# Altium PCB Plocica_kalibrator.PcbDoc (part 1 of 2)
Units mil, origin at the board's own origin, x right, y up, seen from the top; angles counter-clockwise.
Board outline 6889.76 x 4133.86 mil, 2 copper layers (Top Layer, Bottom Layer); 126 components, 118 nets, 449 pads, 105 vias.
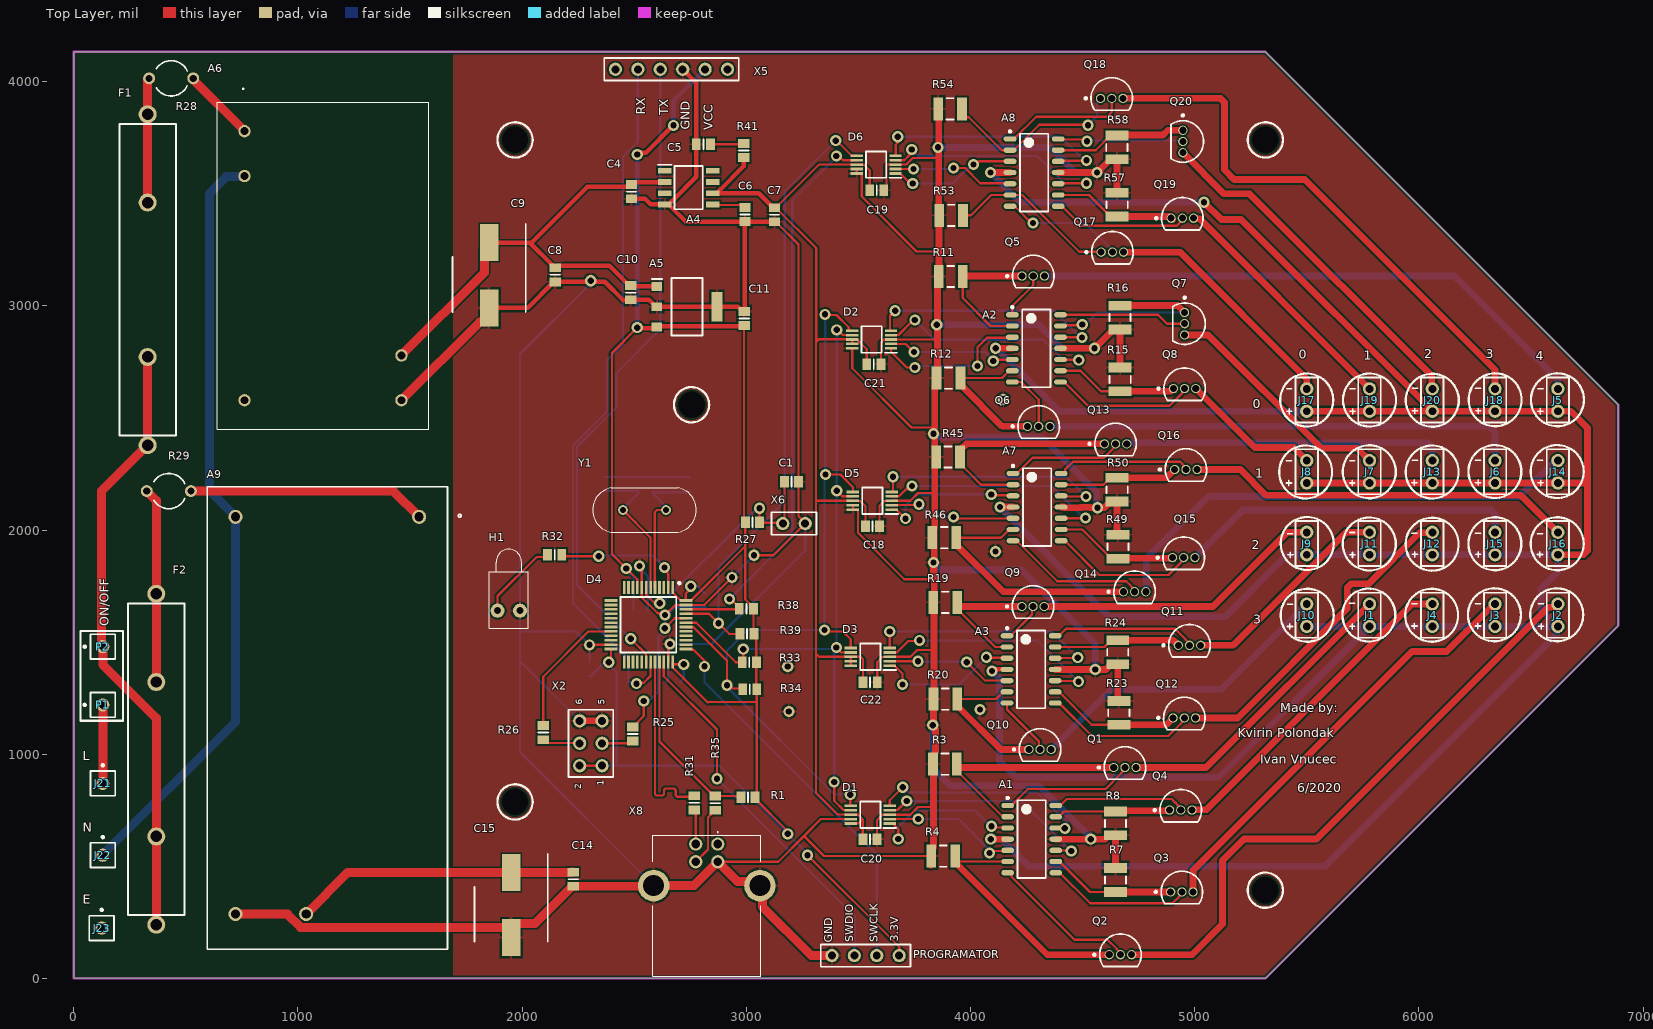
[diagram p0: Top Layer view]
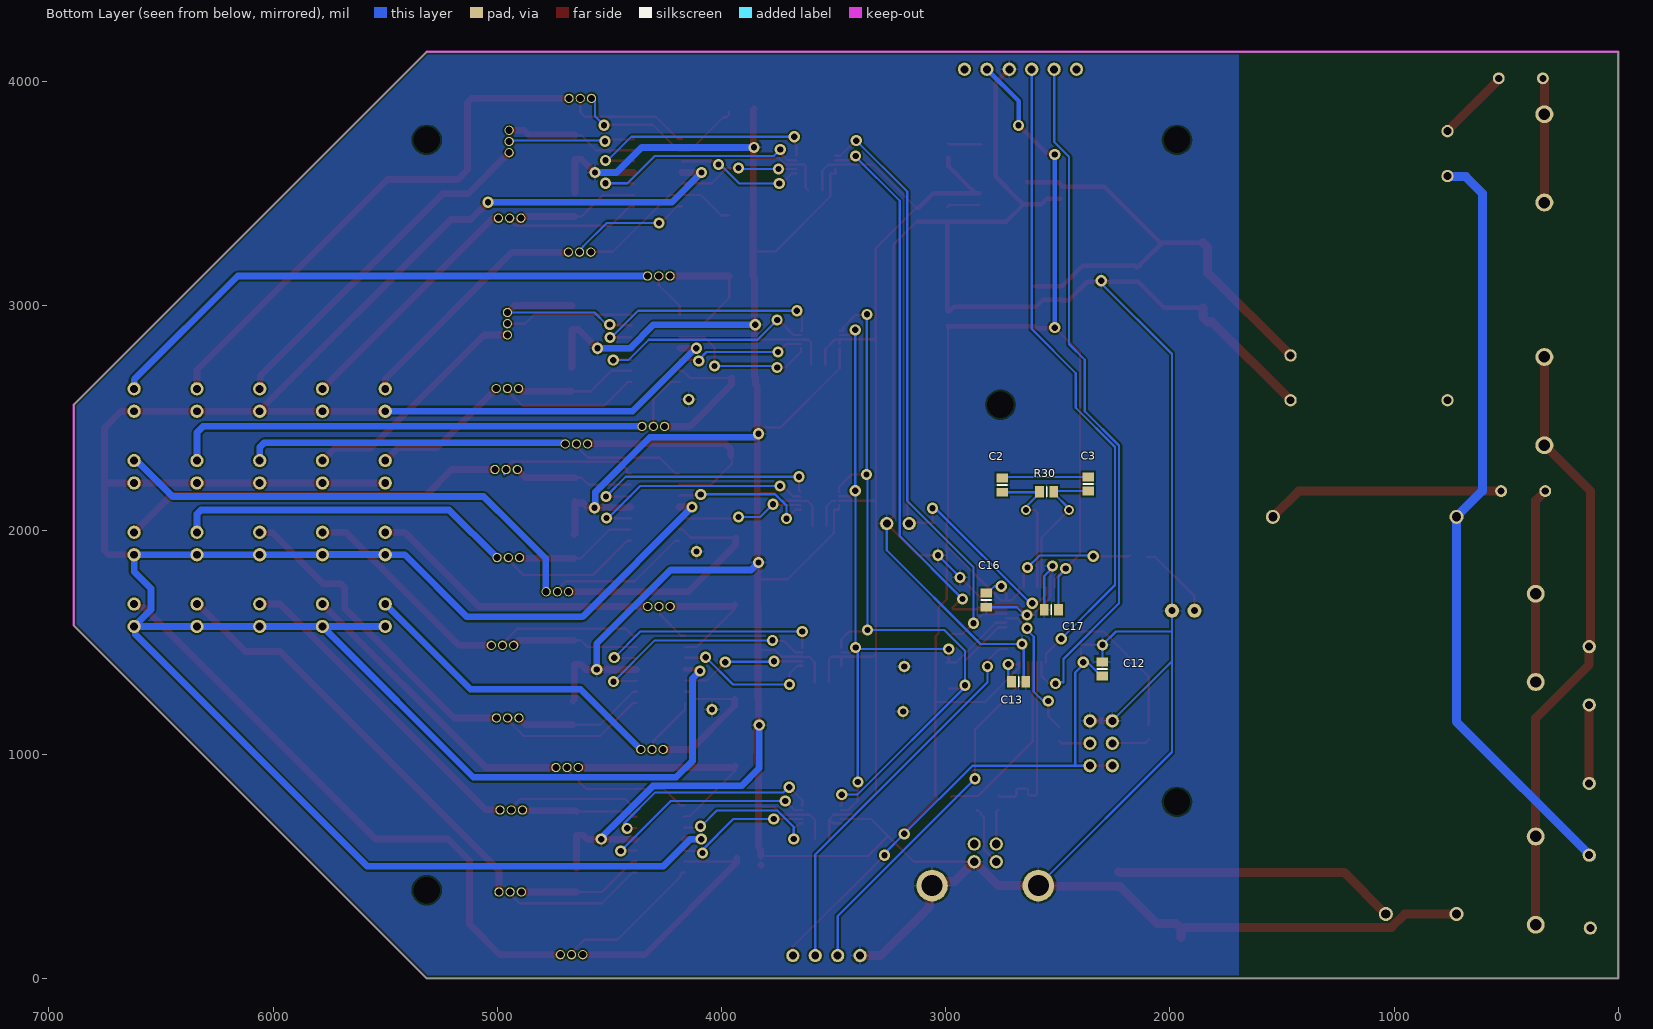
[diagram p1: Bottom Layer view, seen from below]

## Layer stack, top to bottom
Top Solder: solder mask 0.4, Solder Resist, Dk 3.5
Top Layer: signal copper 1.4
Dielectric 1: dielectric 12.6, FR-4, Dk 4.8
Bottom Layer: signal copper 1.4
Bottom Solder: solder mask 0.4, Solder Resist, Dk 3.5

## Board outline
0,0 0,4133.86 5314.96,4133.86 6889.76,2559.06 6889.76,1574.8 5314.96,0

## Design rules (kind name [scope] priority, off if disabled: settings)
Clearance [All] p1: gap=8 ignorepadtopadclearanceinfootprint=TRUE
HoleSize [All] p1: absolutevalues=TRUE maxlimit=125.98 minlimit=0.98 maxpercent=80.000 minpercent=20.000
PolygonConnect [All] p1: connectstyle=Relief reliefconductorwidth=10 reliefentries=4 polygonreliefangle="90 Angle" airgapwidth=10
RoutingVias [All] p1: holewidth=28 width=50 viastyle="Through Hole" minholewidth=28 minwidth=50 maxholewidth=28 maxwidth=50
SolderMaskExpansion [All] p1: expansion=4 istentingtop=FALSE
Width [All] p1: maxlimit=60 minlimit=8 preferedwidth=10 minimp=50.000000 maximp=50.000000 favimp=50.000000
29 further rules are at their usual default settings.

## Classes and differential pairs
component class power: A5 A6 A9 C8 C9 C10 C11 C14 C15 F1 F2 J21 J22 J23 P1 P2 R28 R29
component class mikrokontroler: A4 C1 C2 C3 C4 C5 C6 C7 D4 H1 PROGRAMATOR R1 R25 R26 R27 R30 R31 R32 R33 R34 R35 R38 R39 R41 X2 X5 X6 X8 Y1
component class led5: A8 D6 J17 J18 J19 J20 Q17 Q18 Q19 Q20 R53 R54 R57 R58
component class led4: A3 D3 J9 J10 J11 J12 Q9 Q10 Q11 Q12 R19 R20 R23 R24
component class led3: A2 D2 J5 J6 J7 J8 Q5 Q6 Q7 Q8 R11 R12 R15 R16
component class led2: A1 D1 J1 J2 J3 J4 Q1 Q2 Q3 Q4 R3 R4 R7 R8
component class led1: A7 D5 J13 J14 J15 J16 Q13 Q14 Q15 Q16 R45 R46 R49 R50
component class blokadni_kondenzatori: C12 C13 C16 C17 C18 C19 C20 C21 C22

## Components (designator, comment, footprint, x,y, rotation, side; value= is the part's Value field where it differs from the comment)
A1 "OPA4990" SOIC127P600X175-14N 4273.2,621.5 r0 top
A2 "OPA4990" SOIC127P600X175-14N 4294.2,2810.5 r0 top
A3 "OPA4990" SOIC127P600X175-14N 4270.48,1378.5 r0 top
A4 "REF5050AIDG4" SOIC127P600X175-8N 2742.97,3527.5 r0 top
A5 "MC33275ST-3.3T3G" SOT230P700X175-4N 2735.45,2996 r0 top
A6 "IRM-03-9" IRM039 762,3779 r270 top
A7 "OPA4990" SOIC127P600X175-14N 4297.2,2102.5 r0 top
A8 "OPA4990" SOIC127P600X175-14N 4283.91,3594.5 r0 top
A9 "IRM-15-12" IRM-15-12 596.12,2192.86 r270 top
C1 "Cap" 6-0805_L 3201.5,2216 r180 top value=100nF
C2 "Cap" 6-0805_L 2747,2200.5 r270 bottom value=20pF
C3 "Cap" 6-0805_L 2365,2205.5 r270 bottom value=20pF
C4 "Cap" 6-0805_L 2488.2,3509.5 r90 top value=1uF
C5 "Cap" 6-0805_L 2808.7,3720.5 r0 top value=1uF
C6 "Cap" 6-0805_L 2994.45,3407.5 r90 top value=1uF
C7 "Cap" 6-0805_L 3126,3406.5 r90 top value=1uF
C8 "10V" 6-0805_L 2147,3138.5 r90 top value=100nF
C9 "10V" CAPAE830X1050N 1853,3136.33 r270 top value=47uF
C10 "Cap" 6-0805_L 2484.2,3058.99 r90 top value=330nF
C11 "Cap" 6-0805_L 2990,2943.5 r270 top value=330nF
C12 "Cap" 6-0805_L 2301,1380.5 r270 bottom value=100nF
C13 "Cap" 6-0805_L 2674.5,1323 r0 bottom value=100nF
C14 "16V" 6-0805_L 2229,442.5 r90 top value=100nF
C15 "16V" CAPAE830X1050N 1951,327.67 r270 top value=47uF
C16 "Cap" 6-0805_L 2819,1687.5 r90 bottom value=100nF
C17 "Cap" 6-0805_L 2529,1645 r180 bottom value=100nF
C18 "Cap" 6-0805_L 3563,2018 r180 top value=100nF
C19 "Cap" 6-0805_L 3582,3516 r180 top value=100nF
C20 "Cap" 6-0805_L 3551.5,622 r180 top value=100nF
C21 "Cap" 6-0805_L 3569,2740 r180 top value=100nF
C22 "Cap" 6-0805_L 3552.5,1321 r180 top value=100nF
D1 "DAC5574IDGS" SOP50P490X110-10N 3553.2,730.5 r180 top
D2 "DAC5574IDGS" SOP50P490X110-10N 3559,2850 r180 top
D3 "DAC5574IDGS" SOP50P490X110-10N 3553.2,1434.5 r180 top
D4 "STM32F103C8T6" QFP50P900X900X160-48N 2563.54,1577.5 r270 top
D5 "DAC5574IDGS" SOP50P490X110-10N 3562.2,2130.5 r180 top
D6 "DAC5574IDGS" SOP50P490X110-10N 3579,3630 r180 top
F1 "Fuse 1" 0751.0056 330,2378.3 r90 top
F2 "Fuse 1" 0751.0056 368.55,239.62 r90 top
H1 "LED1" LED-1 1940.88,1640.35 r90 top
J1 "D01-9970242" HDR1X2 5780,1670 r270 top
J2 "D01-9970242" HDR1X2 6620,1670 r270 top
J3 "D01-9970242" HDR1X2 6340,1670 r270 top
J4 "D01-9970242" HDR1X2 6060,1670 r270 top
J5 "D01-9970242" HDR1X2 6620,2630 r270 top
J6 "D01-9970242" HDR1X2 6340,2310 r270 top
J7 "D01-9970242" HDR1X2 5780,2310 r270 top
J8 "D01-9970242" HDR1X2 5500,2310 r270 top
J9 "D01-9970242" HDR1X2 5500,1990 r270 top
J10 "D01-9970242" HDR1X2 5500,1670 r270 top
J11 "D01-9970242" HDR1X2 5780,1990 r270 top
J12 "D01-9970242" HDR1X2 6060,1990 r270 top
J13 "D01-9970242" HDR1X2 6060,2310 r270 top
J14 "D01-9970242" HDR1X2 6620,2310 r270 top
J15 "D01-9970242" HDR1X2 6340,1990 r270 top
J16 "D01-9970242" HDR1X2 6620,1990 r270 top
J17 "D01-9970242" HDR1X2 5500,2630 r270 top
J18 "D01-9970242" HDR1X2 6340,2630 r270 top
J19 "D01-9970242" HDR1X2 5780,2630 r270 top
J20 "D01-9970242" HDR1X2 6060,2630 r270 top
J21 "L" PIN1 130,870 r0 top
J22 "N" PIN1 130,550 r0 top
J23 "E" PIN1 125,225 r0 top
P1 "Plug" PIN1 130,1220 r90 top
P2 "Plug" PIN1 130,1480 r90 top
PROGRAMATOR "Programator" HDR1X4 3682,102 r180 top (schematic designator X1)
Q1 "2N7000" ONSC-TO-92-3-29-11 4689,941 r0 top
Q2 "2N7000" ONSC-TO-92-3-29-11 4669,106 r0 top
Q3 "2N7000" ONSC-TO-92-3-29-11 4943,386 r0 top
Q4 "2N7000" ONSC-TO-92-3-29-11 4938,751 r0 top
Q5 "2N7000" ONSC-TO-92-3-29-11 4280,3133 r0 top
Q6 "2N7000" ONSC-TO-92-3-29-11 4304.2,2462.5 r0 top
Q7 "2N7000" ONSC-TO-92-3-29-11 4955.2,2920.5 r270 top
Q8 "2N7000" ONSC-TO-92-3-29-11 4955,2631 r0 top
Q9 "2N7000" ONSC-TO-92-3-29-11 4279,1659 r0 top
Q10 "2N7000" ONSC-TO-92-3-29-11 4310.2,1021.5 r0 top
Q11 "2N7000" ONSC-TO-92-3-29-11 4977,1486 r0 top
Q12 "2N7000" ONSC-TO-92-3-29-11 4954,1162 r0 top
Q13 "2N7000" ONSC-TO-92-3-29-11 4647.2,2384.5 r0 top
Q14 "2N7000" ONSC-TO-92-3-29-11 4732,1725 r0 top
Q15 "2N7000" ONSC-TO-92-3-29-11 4951,1877 r0 top
Q16 "2N7000" ONSC-TO-92-3-29-11 4961,2270 r0 top
Q17 "2N7000" ONSC-TO-92-3-29-11 4633.2,3239.5 r0 top
Q18 "2N7000" ONSC-TO-92-3-29-11 4630.2,3925.5 r0 top
Q19 "2N7000" ONSC-TO-92-3-29-11 4945,3391 r0 top
Q20 "2N7000" ONSC-TO-92-3-29-11 4947.17,3733.17 r270 top
R1 "Res2" 6-0805_L 3007.5,809 r0 top value=4,7k
R3 "Res2" C1210 3885.85,956 r0 top value=0,1K
R4 "Res2" C1210 3878.85,546 r0 top value=0,1K
R7 "Res2" C1210 4647,439.15 r270 top value=0,1K
R8 "Res2" C1210 4647,691.85 r90 top value=0,1K
R11 "Res2" C1210 3912,3131 r0 top value=0,1K
R12 "Res2" C1210 3902.15,2678 r0 top value=0,1K
R15 "Res2" C1210 4668,2671.85 r270 top value=0,1K
R16 "Res2" C1210 4667,2948 r90 top value=0,1K
R19 "Res2" C1210 3887.83,1677.56 r0 top value=0,1K
R20 "Res2" C1210 3887.85,1246 r0 top value=0,1K
R23 "Res2" C1210 4662,1184.85 r270 top value=0,1K
R24 "Res2" C1210 4657,1455 r90 top value=0,1K
R25 "Res2" 6-0805_L 2494,1090.5 r90 top value=10K
R26 "Res2" 6-0805_L 2094,1096.5 r270 top value=10K
R27 "Res2" 6-0805_L 3027.5,2035 r180 top value=4.7K
R28 "Res Varistor" CAPR5-4X5 435,4015 r0 top
R29 "Res Varistor" CAPR5-4X5 424.43,2174 r0 top
R30 "Res2" 6-0805_L 2550,2170 r0 bottom value=1M
R31 "Res2" 6-0805_L 2767,783.5 r270 top value=20
R32 "Res2" 6-0805_L 2145.5,1889 r180 top value=260R
R33 "Res2" 6-0805_L 3013.5,1410 r0 top value=4.7K
R34 "Res2" 6-0805_L 3015.5,1291 r0 top value=4.7K
R35 "Res2" 6-0805_L 2862,782 r270 top value=20
R38 "Res2" 6-0805_L 3000.5,1649 r0 top value=4.7K
R39 "Res2" 6-0805_L 3003.5,1537 r0 top value=4.7K
R41 "Res2" 6-0805_L 2988.45,3693 r90 top value=0.001K
R45 "Res2" C1210 3900,2326 r0 top value=0,1K
R46 "Res2" C1210 3883,1966 r0 top value=0,1K
R49 "Res2" C1210 4658,1925.85 r90 top value=0,1K
R50 "Res2" C1210 4654,2180.15 r270 top value=0,1K
R53 "Res2" C1210 3914,3404 r0 top value=0,1K
R54 "Res2" C1210 3908.85,3879 r0 top value=0,1K
R57 "Res2" C1210 4654.2,3451.35 r270 top value=0,1K
R58 "Res2" C1210 4653.2,3706.65 r90 top value=0,1K
X2 "Header 3X2" HDR2X3 2357,949 r90 top
X5 "Bluetooth" HDR1X6 2416.54,4055.12 r0 top
X6 "RESET" HDR1X2 3163,2029 r0 top
X8 "61729-1011BLF" 617291011BLF 2873.22,599.43 r0 top
Y1 "ABL-8.000MHZ-B2" HC/49US_(AT49)PTH 2546.21,2089.31 r180 top

## Footprints (in the part's own frame and the unit in brackets; to place one, negate y for a bottom-side part, rotate by r counter-clockwise, add the part's x,y. Pads: shape width x height; smd on the part's side, far side on the other; paste and mask are expansions set on the pad)
6-0805_L [mm] "Chip Resistor, Body 2.0x1.2mm, IPC High Density"
  rect 1x1.3 smd: 1(-0.8,0) 2(0.8,0)
  silkscreen extent 0,-0.55 0,0.55, body extent -1.07,-0.7 1.07,0.7, height 0.7
0751.0056 [mil] "6.3 x 32 mm Fuse cliping"
  round 80 hole 51.18: 1(0,0) 1(393.7,0) 2(1082.68,0) 2(1476.38,0)
  silkscreen extent 43,-126 1433,126
617291011BLF [mm]
  round 1.5 hole 1: 1(0,0) 2(-2.5,0) 3(-2.5,-2) 4(0,-2)
  round 3.57 hole 2.38: MH1(4.77,-4.71) MH2(-7.27,-4.71)
  silkscreen extent -7.35,-14.99 4.85,1.4, body extent -8.35,-14.99 5.86,1.01, height 11.6
C1210 [mm] "Chip Capacitor, Body 3.2x2.5mm, IPC High Density"
  rect 1.1x2.6 smd: 1(-1.35,0) 2(1.35,0)
  silkscreen extent -0.4,-1.2 0.4,1.2, body extent -1.7,-1.35 1.7,1.35, height 1.3
CAPAE830X1050N [mm]
  rect 4.2x2.1 smd: 1(-3.7,0) 2(3.7,0)
  silkscreen extent -5.8,-4.15 4.15,4.15, body extent -5,-4.25 5,4.25, height 10.5
CAPR5-4X5 [mm] "Capacitor; 2 Leads"
  round 1.35 hole 0.8: 1(-2.5,0) 2(2.5,0)
  silkscreen extent -1.69,-2 1.82,2
HC/49US_(AT49)PTH [mm]
  round 1.1 hole 0.66: 1(-2.44,0) 2(2.44,0)
  silkscreen extent -5.88,-2.5 5.88,2.5
HDR1X2 [mm] "Connector; Header; 2 Position"
  round 1.5 hole 0.9: 1(0,0) 2(2.54,0)
  silkscreen extent -1.27,-1.27 3.81,1.27
HDR1X4 [mm] "Connector; Header; 4 Position"
  round 1.5 hole 0.9: 1(0,0) 2(2.54,0) 3(5.08,0) 4(7.62,0)
  silkscreen extent -1.27,-1.27 8.89,1.27
HDR1X6 [mm] "Connector; Header; 6 Position"
  round 1.5 hole 0.9: 1(0,0) 2(2.54,0) 3(5.08,0) 3(10.16,0) 4(7.62,0) 6(12.7,0)
  silkscreen extent -1.27,-1.27 13.97,1.27
HDR2X3 [mm] "Connector; Header; 3x2 Position"
  round 1.5 hole 0.9: 1(0,0) 2(0,2.54) 3(2.54,0) 4(2.54,2.54) 5(5.08,0) 6(5.08,2.54)
  silkscreen extent -1.27,-1.27 6.35,3.81
IRM039 [mm]
  round 1.4 hole 0.9: 1(0,0) 2(5.08,0) 3(30.48,0) 4(30.48,17.78) 5(25.4,17.78)
  silkscreen extent -4.85,-3.11 33.74,20.89, body extent -3.26,-3.11 33.74,20.89, height 15.1
IRM-15-12 [mm]
  round 1.6 hole 1.04: 1(3.4,24) 2(3.4,3.2) 3(48.4,3.2) 4(48.4,11.2)
  silkscreen extent 0,0 52.4,28.75
LED-1 [mm] "LED; 2 Leads"
  round 1.6 hole 0.8: 1(0,1.27) 2(0,-1.27)
  silkscreen extent -2,-2.2 6.95,2.2
ONSC-TO-92-3-29-11 [mm] "TO, 3-Leads, Body Dia 4.7mm, Pitch 1.27mm"
  round 1.05 hole 0.8: 1(-1.27,0) 2(0,0) 3(1.27,0)
  silkscreen extent -3.07,-1.34 2.35,2.35, body extent -2.35,-1.33 2.36,2.36, height 7.87
PIN1 [mm] "Connector; Plug"
  round 1.5 hole 0.9: 1(0,0)
  silkscreen extent -1.4,-1.4 1.4,2.17
QFP50P900X900X160-48N [mm]
  rect 1.475x0.3 smd: 1(-4.238,2.75) 2(-4.238,2.25) 3(-4.238,1.75) 4(-4.238,1.25) 5(-4.238,0.75) 6(-4.238,0.25) 7(-4.238,-0.25) 8(-4.238,-0.75) 9(-4.238,-1.25) 10(-4.238,-1.75) 11(-4.238,-2.25) 12(-4.238,-2.75) 25(4.238,-2.75) 26(4.238,-2.25) 27(4.238,-1.75) 28(4.238,-1.25) 29(4.238,-0.75) 30(4.238,-0.25) 31(4.238,0.25) 32(4.238,0.75) 33(4.238,1.25) 34(4.238,1.75) 35(4.238,2.25) 36(4.238,2.75)
  rect 0.3x1.475 smd: 13(-2.75,-4.238) 14(-2.25,-4.238) 15(-1.75,-4.238) 16(-1.25,-4.238) 17(-0.75,-4.238) 18(-0.25,-4.238) 19(0.25,-4.238) 20(0.75,-4.238) 21(1.25,-4.238) 22(1.75,-4.238) 23(2.25,-4.238) 24(2.75,-4.238) 37(2.75,4.238) 38(2.25,4.238) 39(1.75,4.238) 40(1.25,4.238) 41(0.75,4.238) 42(0.25,4.238) 43(-0.25,4.238) 44(-0.75,4.238) 45(-1.25,4.238) 46(-1.75,4.238) 47(-2.25,4.238) 48(-2.75,4.238)
  silkscreen extent -4.85,-3.15 3.15,3.63, body extent -4.5,-4.5 4.5,4.5, height 1.6
SOIC127P600X175-8N [mm]
  rect 1.525x0.65 smd: 1(-2.712,1.905) 2(-2.712,0.635) 3(-2.712,-0.635) 4(-2.712,-1.905) 5(2.712,-1.905) 6(2.712,-0.635) 7(2.712,0.635) 8(2.712,1.905)
  silkscreen extent -3.47,-2.45 1.6,2.58, body extent -3,-2.45 3,2.45, height 1.75
SOIC127P600X175-14N [mm] "SOIC, 14-Leads, Body 8,65x3,90mm, Pitch 1,27mm, IPC Medium Density"
  oval 1.45x0.6 smd: 1(-2.725,3.81) 2(-2.725,2.54) 3(-2.725,1.27) 4(-2.725,0) 5(-2.725,-1.27) 6(-2.725,-2.54) 7(-2.725,-3.81) 8(2.725,-3.81) 9(2.725,-2.54) 10(2.725,-1.27) 11(2.725,0) 12(2.725,1.27) 13(2.725,2.54) 14(2.725,3.81)
  silkscreen extent -2.85,-4.4 1.6,4.78, body extent -2,-4.4 2,4.4, height 1.75
SOP50P490X110-10N [mm]
  rect 1.4x0.3 smd: 1(-2.2,1) 2(-2.2,0.5) 3(-2.2,0) 4(-2.2,-0.5) 5(-2.2,-1) 6(2.2,-1) 7(2.2,-0.5) 8(2.2,0) 9(2.2,0.5) 10(2.2,1)
  silkscreen extent -2.9,-1.5 1.15,1.5, body extent -2.45,-1.5 2.45,1.5, height 1.1
SOT230P700X175-4N [mm]
  rect 1.2x1 smd: 1(-3.4,2.3) 2(-3.4,0) 3(-3.4,-2.3)
  rect 1.2x3.3 smd: 4(3.4,0)
  silkscreen extent -4,-3.25 1.75,3.25, body extent -3.5,-3.25 3.5,3.25, height 1.75

## Part data
A4: "Integrated Circuit", Manufacturer_Name="Texas Instruments", Mouser Part Number=595-REF5050AIDG4, Datasheet Link=http://www.ti.com/lit/ds/symlink/ref5050.pdf, Height=1.75mm, Manufacturer_Part_Number=REF5050AIDG4, Mouser Price/Stock=https://www.mouser.com/Search/Refine.aspx?Keyword=595-REF5050AIDG4
A5: "Integrated Circuit", Manufacturer_Name="ON Semiconductor", Mouser Part Number=863-MC33275ST-3.3T3G, RS Part Number=7856910P, Allied Price/Stock=https://www.alliedelec.com/on-semiconductor-mc33275st-3-3t3g/70340056/, Allied_Number=70340056, Datasheet Link=http://www.onsemi.com/pub/Collateral/MC33275-D.PDF, Height=1.75mm, Manufacturer_Part_Number=MC33275ST-3.3T3G, Mouser Price/Stock=https://www.mouser.com/Search/Refine.aspx?Keyword=863-MC33275ST-3.3T3G, RS Price/Stock=http://uk.rs-online.com/web/p/products/7856910P
A6: "Power Supply", Manufacturer_Name="Mean Well", Mouser Part Number=709-IRM03-9, RS Part Number=1359235P, Allied Price/Stock=https://www.alliedelec.com/meanwellusa-irm-03-9/70879802/, Allied_Number=70879802, Datasheet Link=https://componentsearchengine.com/Datasheets/2/IRM-03-9.pdf, Height=15mm, Manufacturer_Part_Number=IRM-03-9, Mouser Price/Stock=https://www.mouser.com/Search/Refine.aspx?Keyword=709-IRM03-9, RS Price/Stock=http://uk.rs-online.com/web/p/products/1359235P
A9: "Power Supply", Manufacturer_Name="Mean Well", Mouser2 Part Number=709-IRM15-12, Datasheet Link=https://www.meanwell-web.com/content/files/pdfs/productPdfs/MW/IRM-15-spec.pdf, Manufacturer_Part_Number=IRM-15-12, Mouser2 Price/Stock=https://www.mouser.com/Search/Refine.aspx?Keyword=709-IRM15-12
C1 C2 C3 C4 C5 C6 C7 C10 C11 C12 C13 C16 C17 C18 C19 C20 C21 C22: "Capacitor", LatestRevisionDate=17-Jul-2002, LatestRevisionNote="Re-released for DXP Platform.", PackageDescription="Radial Cap, Thru-Hole; 2 Leads; 0.3 in Pin Spacing", PackageReference=RAD-0.3, Published=8-Jun-2000, Publisher="Altium Limited"
C8 C14: library part Cap, "Capacitor", LatestRevisionDate=17-Jul-2002, LatestRevisionNote="Re-released for DXP Platform.", PackageDescription="Radial Cap, Thru-Hole; 2 Leads; 0.3 in Pin Spacing", PackageReference=RAD-0.3, Published=8-Jun-2000, Publisher="Altium Limited"
C9 C15: library part Cap2, "Capacitor", PackageDescription="Capacitor; 2 Leads", PackageReference=CAPR5-4X5, Published=23-Sep-2002, Publisher="Altium Limited"
D1 D2 D3 D5 D6: "Integrated Circuit", Manufacturer_Name="Texas Instruments", Mouser Part Number=595-DAC5574IDGS, RS Part Number=6621533P, Datasheet Link=http://www.ti.com/lit/gpn/dac5574, Height=1.1mm, Manufacturer_Part_Number=DAC5574IDGS, Mouser Price/Stock=https://www.mouser.com/Search/Refine.aspx?Keyword=595-DAC5574IDGS, RS Price/Stock=http://uk.rs-online.com/web/p/products/6621533P
D4: "Integrated Circuit", Manufacturer_Name=STMicroelectronics, Mouser Part Number=511-STM32F103C8T6, RS Part Number=0402279P, Allied Price/Stock=http://www.alliedelec.com/stmicroelectronics-stm32f103c8t6/70390993/, Allied_Number=70390993, Datasheet Link=http://www.st.com/st-web-ui/static/active/en/resource/technical/document/datasheet/CD00161566.pdf, Height=1.6mm, Manufacturer_Part_Number=STM32F103C8T6, Mouser Price/Stock=https://www.mouser.com/Search/Refine.aspx?Keyword=511-STM32F103C8T6, RS Price/Stock=http://uk.rs-online.com/web/p/products/0402279P
F1 F2: "Fuse", LatestRevisionDate=17-Jul-2002, LatestRevisionNote="Re-released for DXP Platform.", PackageDescription="Thru-Hole; 2 Leads", PackageReference=PIN-W2/E2.8, Published=8-Jun-2000, Publisher="Altium Limited"
H1: "Typical RED GaAs LED", LatestRevisionDate=08-Jul-2005, LatestRevisionNote="Mech Layer 1 removed.", PackageDescription="LED; 2 Leads", PackageReference=LED-1, Published=8-Jun-2000, Publisher="Altium Limited"
J1 J2 J3 J4 J5 J6 J7 J8 J9 J10 J11 J12 J13 J14 J15 J16 J17 J18 J19 J20: "Connector", Manufacturer_Name=HARWIN, Mouser Part Number=855-D01-9970242, Datasheet Link=https://componentsearchengine.com/Datasheets/1/D01-9970242.pdf, Height=4.25mm, Manufacturer_Part_Number=D01-9970242, Mouser Price/Stock=https://www.mouser.com/Search/Refine.aspx?Keyword=855-D01-9970242
J21 J22 J23: library part Socket, "Socket", LatestRevisionDate=17-Jul-2002, LatestRevisionNote="Re-released for DXP Platform.", Publisher="Altium Limited"
PROGRAMATOR: library part "Header 4", "Header, 4-Pin", LatestRevisionDate=17-Jul-2002, LatestRevisionNote="Re-released for DXP Platform.", Publisher="Altium Limited"
Q1 Q2 Q3 Q4 Q5 Q6 Q7 Q8 Q9 Q10 Q11 Q12 Q13 Q14 Q15 Q16 Q17 Q18 Q19 Q20: library part CMP-1058-00936-1, "Small Signal MOSFET, 200 mA, 60 V, N-Channel, 3-Pin TO-92, Bulk Box", Manufacturer="On Semiconductor", Package Type=TO-92, Channel Polarity="N Channel", Ciss Typ (pF)=60, ComponentLink1Description="Manufacturer URL", ComponentLink1URL=http://www.onsemi.com/, ComponentLink2Description=Datasheet, ComponentLink2URL=http://www.onsemi.com/pub_link/Collateral/2N7000-D.PDF, ComponentLink3Description="Package Specification", ComponentLink3URL=http://www.onsemi.cn/pub_link/Collateral/2N6426-D.PDF, Configuration=Single, Coss Typ (pF)=25, Crss Typ (pF)=5, DatasheetVersion="Rev. 8", ID Max (A)=0.2, Mounting Technology="Through Hole", PackageDescription="3-Pin Transistor Outline, Body 4.825 x 3.685 mm, Pitch 1.27 mm", PackageReference=TO-92-3-29-11_AM_SL, PackageVersion="Rev. AM", Packing="Bulk Box", PartNumber=2N7000, PD Max (W)=0.35, V(BR)DSS Min (V)=60, VGS Max (V)=20, VGS(th) Max (V)=3
R1 R3 R4 R7 R8 R11 R12 R15 R16 R19 R20 R23 R24 R25 R26 R27 R30 R31 R32 R33 R34 R35 R38 R39 R41 R45 R46 R49 R50 R53 R54 R57 R58: "Resistor", LatestRevisionDate=17-Jul-2002, LatestRevisionNote="Re-released for DXP Platform.", PackageDescription="Axial Device, Thru-Hole; 2 Leads; 0.4 in Pin Spacing", PackageReference=AXIAL-0.4, Published=8-Jun-2000, Publisher="Altium Limited"
R28 R29: "Varistor (Voltage-Sensitive Resistor)", Code_IPC=RESC2012, LatestRevisionDate=29-May-2009, LatestRevisionNote="IPC-7351 Footprint Added.", PackageDescription="Chip Resistor 0805 Case Size", PackageReference=6-0805, PackageVersion=Mar-2003, Published=24-Mar-1999, Publisher="Altium Limited"
X2: "Header, 3-Pin, Dual row", LatestRevisionDate=17-Jul-2002, LatestRevisionNote="Re-released for DXP Platform.", Publisher="Altium Limited"
X5: library part "Header 6", "Header, 6-Pin", LatestRevisionDate=17-Jul-2002, LatestRevisionNote="Re-released for DXP Platform.", Publisher="Altium Limited"
X6: library part "Header 2", "Header, 2-Pin", LatestRevisionDate=17-Jul-2002, LatestRevisionNote="Re-released for DXP Platform.", Publisher="Altium Limited"
X8: "Connector", Manufacturer_Name=Amphenol, Mouser Part Number=649-61729-1011BLF, RS Part Number=7710041, Allied Price/Stock=https://www.alliedelec.com/amphenol-fci-61729-1011blf/70236839/, Allied_Number=70236839, Datasheet Link=https://www.mouser.com/datasheet/2/18/61729-1363119.pdf, Height=11.5mm, Manufacturer_Part_Number=61729-1011BLF, Mouser Price/Stock=https://www.mouser.com/Search/Refine.aspx?Keyword=649-61729-1011BLF, RS Price/Stock=http://uk.rs-online.com/web/p/products/7710041
Y1: "Crystal or Oscillator", Manufacturer_Name=ABRACON, Mouser Part Number=815-ABL-8-B2, RS Part Number=1710614, Datasheet Link=http://www.abracon.com/Resonators/ABL.pdf, Manufacturer_Part_Number=ABL-8.000MHZ-B2, Mouser Price/Stock=https://www.mouser.co.uk/ProductDetail/ABRACON/ABL-8000MHZ-B2?qs=zLkLEWnxMJxHYmzIauBRTw%3D%3D, RS Price/Stock=http://uk.rs-online.com/web/p/products/1710614
P1 P2: LatestRevisionDate=17-Jul-2002, LatestRevisionNote="Re-released for DXP Platform.", Publisher="Altium Limited"

## Free pads (board coordinates)
  round 60 hole 118.11: 0(1968.5,787.4) 0(1968.5,3740.16) 0(2755.91,2559.06) 0(5314.96,393.7) 0(5314.96,3740.16)

## Via types
v1: diameter 50, hole 28, Top Layer to Bottom Layer, 105 vias

## Nets (pads, with @x,y where several pads share a name; then routed paths per layer and width w, separated by ;. In a path a pad name is that pad's centre, name@x,y a point inside that pad or via, vN(x,y) a via of type N, cw(c..) or ccw(c..) an arc to the next point about the centre after c; other vN are vias at no path point)
3.3V: A5.3 C11.2 C12.2 C13.2 C16.2 C17.2 D4.1 D4.9 D4.24 D4.36 D4.48 PROGRAMATOR.1 R1.2 R27.2 R33.2 R34.2 R38.2 R39.2 X2.1 X2.2 X5.3@2816.54,4055.12 | length 9255.4
  Top Layer w10: X2.2 X2.1 ; v1(2386.88,1410.88) 2397,1421 2397,1468.91 D4.24 ; v1(2514,2903) 2401,2790 2401,1893 v1(2465,1829) 2513.54,1780.46 2513.54,1745.13 D4.9 ; v1(2514,3675) v1@2521.65,3682.65 ; 2573.04,2900 2576.04,2897 ; A5.3@2596.14,2900 A5.3 ; D4.36 D4.36@2671.8,1401.91 ; D4.1 2671.8,1721.22 2707.26,1685.76 D4.48 ; v1(2721,1401) 2672.71,1401 D4.36@2671.8,1401.91 ; v1(2752,1749) 2752,1738.18 2730.39,1716.56 D4.48 ; C11.2 2990,2041.01 R27.2 2996.01,1928.26 ; v1(3185,645) 3185,657.09 3038.99,803.09 R1.2 3047,817.01 3047,1233 ; v1(3273,550) 3682,141 PROGRAMATOR.1 ; D4.36@2671.8,1401.91 2671.8,1387.52 2828.03,1231.28 2828.14,1231.28 2829.86,1233 3047,1233 ; D4.48 2753.52,1685.76 2996.01,1928.26 ; 2996.01,1928.26 2996.01,1690.9 3032,1654.91 R38.2 3032,1540 R39.2 3044.99,1527.01 R33.2 3044.99,1293.01 R34.2 3047,1233
  Top Layer w20: v1(2514,2903) 2517,2900 2573.04,2900 A5.3@2596.14,2900 ; v1@2521.65,3682.65 2552.65,3682.65 v1(2675,3805) ; A5.3 2604.87,2908.73 2986.72,2908.73 C11.2
  Bottom Layer w10: C12.2 2306.91,1349.01 2373.69,1415.79 2378.6,1410.88 v1(2386.88,1410.88) 2386.88,1400.06 2422,1364.94 2422,949 ; X2.1 2422,949 ; v1(2465,1829) 2465,1825 2497.5,1792.5 C17.2 ; C13.2 2720.69,1337.69 2720.69,1398.69 2721,1399 v1(2721,1401) ; v1(2752,1749) 2783.09,1749 2813.09,1718.99 C16.2 ; v1(3273,550) 3273,557 v1(3185,645) 2881,949 2422,949
  Bottom Layer w20: v1(2514,2903) v1(2514,3675) ; v1(2675,3805) 2675,3913.58 X5.3@2816.54,4055.12
5V: A4.6 C7.2 C18.2 C19.2 C20.2 C21.2 C22.2 D1.8 D1.10 D2.8 D2.9 D3.8 D3.9 D3.10 D5.8 D6.8 R41.1 | length 5626
  Top Layer w10: C7.2 C7.2@3131.91,3437.99 ; 3311,3258.9 3311,2127 ; D1.10@3465.8,691.91 D1.10 3467.36,691.91 3502.66,691.91 3520,709.24 ; D3.10 D3.9 D3.8 ; D2.9 D2.8 ; D5.8 3314.5,2130.5 3311,2127 ; D5.8@3493.22,2130.5 3492.44,2129.72 3508.53,2129.72 3531.5,2106.74 C18.2 ; C20.2 3520,709.24 ; C22.2 3521,1424 3510.5,1434.5 D3.8 ; C21.2 3537.5,2806.54 3494.04,2850 D2.8 ; C19.2 3550.5,3604.05 3525.33,3629.22 3493.17,3629.22 D6.8 3323.91,3630 C7.2@3131.91,3437.99 ; C7.2@3131.91,3437.99 3313,3256.9 3313,2946.26 3313.5,2945.76 3313.5,2841.5 3324,2852 3325.22,2850.78 3471.61,2850.78 D2.8 ; 3311,1448 3311,2127 ; 3311,1448 3311,828 3407.72,731.28 3465.8,731.28 D1.8 3467.36,729.72 3499.53,729.72 3520,709.24 ; 3311,1448 3324,1435 3466.08,1435 D3.8
  Top Layer w20: A4.6 A4.6@2866.96,3502.5 ; R41.1 2988,3661.06 2988,3622.49 2884.95,3519.43 2883.9,3519.43 A4.6@2866.96,3502.5 ; C7.2 3120.09,3437.99 3055.59,3502.5 A4.6@2866.96,3502.5
9V: A4.2 A5.1 A6.5 C4.2 C8.2 C9.1 C10.2 | length 2350
  Top Layer w20: C9.1 2035,3282 2131.41,3185.59 C8.2@2131.41,3179.69 ; A5.1 2599.62,3088.52 2486.17,3088.52 C10.2 2478.29,3090.49 2389.78,3179 2156,3179 C8.2 2134.36,3182.64 2038.75,3278.25 2291.81,3531.31 2478.51,3531.31 2497.88,3550.68 2515.18,3550.68 2515.5,3551 2634.7,3551 A4.2
  Top Layer w40: A6.5 1831.66,3148.66 1831.66,3260.66 C9.1
12V: A1.4 A2.4 A3.4 A7.4 A8.4 J1.2 J2.2 J3.2 J4.2 J5.2 J6.2 J7.2 J8.2 J9.2 J10.2 J11.2 J12.2 J13.2 J14.2 J15.2 J16.2 J17.2 J18.2 J19.2 J20.2 | length 17219.5
  Top Layer w20: v1(4096.25,1371.75) 4096.25,1379 4096.5,1378.75 4162.94,1378.75 A3.4 ; A7.4@4189.22,2103.19 A7.4
  Top Layer w30: v1(4089.5,3594.5) A8.4 ; v1(4090.5,621.5) A1.4 ; v1(4112.27,2811) 4112.53,2810.75 4186.66,2810.75 A2.4 ; v1(4131.5,2102.5) A7.4 ; v1(5042.13,3461.81) 5118.94,3385 5207,3385 6060,2532 J20.2 ; J8.2 J7.2 J13.2 J6.2 J14.2 6752.5,2210 ; J17.2 J19.2 J20.2 ; J16.2 6734.93,1890 6752.5,1907.57 6752.5,2210 ; J20.2 J18.2 J5.2 6678,2530 6752.5,2455.5 6752.5,2210
  Bottom Layer w30: v1(4089.5,3594.5) 4222.19,3461.81 v1(5042.13,3461.81) ; v1(4090.5,621.5) 4139.15,621.5 4260.65,500 5580,500 6614.44,1534.44 6614.44,1569.44 J2.2@6615,1570 ; v1(4096.25,1371.75) 4130,1338 4130,970 4202.67,897.33 5107.33,897.33 J1.2 ; v1(4112.27,2811) 4116.53,2811 4397.53,2530 J17.2@5493.68,2530 ; v1(4131.5,2102.5) 4620.99,1613 5135.67,1613 5412.67,1890 J9.2 5501.25,1891.25 5778.75,1891.25 J11.2 J12.2 J15.2 J16.2 6620,1815 6545,1740 6545,1645 J2.2 J2.2@6615,1570 ; J10.2 J1.2 ; J3.2 J4.2 J1.2 ; J3.2@6349.49,1573.93 6353.42,1570 J2.2@6615,1570
15V: A9.4 C14.2 C15.1 | length 1269.3
  Top Layer w40: A9.4 1223.06,473.34 C15.1 2223.06,473.34 2223.72,474 C14.2
AC_230V_7_N: A6.2 A9.2 J22.1 | length 3443.2
  Bottom Layer w40: J22.1@120.45,544 722.1,1145.65 A9.2 606,2175.1 606,3502 680.11,3576.11 759.11,3576.11 A6.2
AC_230V_E_7: J23.1
AC_230V_L_7: F1.1 F2.1 P2.1 | length 2719.2
  Top Layer w40: F1.1@330,2772 330,2378.3 328.3,2378.3 125,2175 125,1485 P2.1 130,1400 368.55,1161.45 368.55,633.32 F2.1@368.55,239.62
BOOT0_6: D4.44 R25.2 | length 624.5
  Top Layer w10: R25.2 2543,1171 v1(2543,1238) ; v1(2637,1562) 2681.51,1606.51 2729.87,1606.51 D4.44
  Bottom Layer w10: v1(2543,1238) 2565.57,1238 2607,1279.43 2607,1524 2637,1554 v1(2637,1562)
BOOT1_6: D4.20 R26.1 | length 604.3
  Top Layer w10: R26.1 2094,1346 2295.19,1547.19 2395.91,1547.19 D4.20
GND: A1.11 A2.11 A3.11 A4.4 A5.2 A5.4 A6.4 A7.11 A8.11 A9.3 C1.1 C4.1 C5.1 C6.1 C7.1 C8.1 C9.2 C10.1 C11.1 C12.1 C13.1 C14.1 C15.2 C16.1 C17.1 C18.1 C19.1 C20.1 C21.1 C22.1 D1.3 D1.9 D2.3 D2.10 D3.3 D4.8 D4.23 D4.35 D4.47 D5.3 D5.9 D5.10 D6.3 D6.9 D6.10 H1.2 PROGRAMATOR.4 R3.1 R4.1 R7.1 R8.1 R11.1 R12.1 R15.1 R16.1 R19.1 R20.1 R23.1 R24.1 R45.1 R46.1 R49.2 R50.2 R53.1 R54.1 R57.1 R58.1 X2.5 X2.6 X5.4 X6.2 X8.4 X8.MH1 X8.MH2 | length 29578.1
  Top Layer w10: v1(2301,1488) 2301.46,1488.46 2396.23,1488.46 D4.23 ; v1(2524,1840) 2524,1829.18 2534.01,1819.17 D4.8 2534.01,1699.61 2604.96,1628.65 2630.35,1628.65 v1(2638,1621) 2683.08,1666.08 D4.47 2813.08,1666.08 v1(2936,1789) ; D4.35 2652.12,1484.12 v1(2660,1492) ; X8.4 3142.69,520.69 3260,638 ; v1(3035,1888) 3122,1888 X6.2 3263,2031.96 3232.99,2061.96 C1.1 3232.99,3273.91 3131.91,3375 C7.1 ; D1.9 3332.81,710.81 3260,638 ; D2.10 3472.39,2721.39 3736.77,2457 3835,2457 ; D5.9 D5.10 3497.24,2091.13 3498.14,2090.22 3498.14,1987.7 3704.84,1781 3838.85,1781 ; D6.9 D6.10 3514.04,3590.63 3514.94,3589.72 3514.94,3487.9 3759.84,3243 3859.85,3243 ; C20.1 3582.99,705.84 3606.87,729.72 3639.03,729.72 D1.3 3731.28,730.5 3765.79,765 3834.7,765 ; C22.1 3583.99,1410.84 3606.87,1433.72 3639.03,1433.72 D3.3 3732.13,1434.5 3762.64,1465 3837.28,1465 ; C18.1 3594.5,2108.35 3615.87,2129.72 3648.03,2129.72 D5.3 3731.76,2130.5 3766.26,2165 3840.35,2165 ; C21.1 3600.5,2837.05 3612.67,2849.22 3644.83,2849.22 D2.3 3850,2850 3853,2847 ; C19.1 3625.06,3527.56 3625.06,3627.63 3627.42,3630 D6.3 3712.26,3630 3741.26,3659 3858.35,3659 ; R4.1 3347,546 3260,633 3260,638
  Top Layer w20: C9.2 2024.75,2990.66 2141.09,3107.01 C8.1 2368.99,3107.01 2450,3026 2482.7,3026 C10.1 2566.16,3027.5 2597.65,2996 A5.2 A5.4 2870.31,2997 2962.09,2997 2984.09,2975 C11.1 2992.22,2977.22 2992.22,3373.78 C6.1 ; C4.1 2548.63,3478 2574.13,3452.5 A4.4 A4.4@2653.42,3452.5 ; X5.4 2777.2,3994.45 C5.1 2777.2,3575.23 2671.41,3469.43 2670.36,3469.43 A4.4@2653.42,3452.5 ; C7.1 3125.5,3375.5 2994.95,3375.5 C6.1 ; R57.1@4653.2,3505.5 R57.1 ; A4.4@2653.42,3452.5 2729.91,3376.01 C6.1
  Top Layer w30: X2.6 X2.5 ; R4.1@3823,505 R4.1@3823.93,505.93 ; R4.1 3825.7,575.53 3834.7,584.53 3834.7,765 R3.1@3834.7,956 ; v1(3832,1130) 3832,1124.59 3844,1112.59 3844,1009.75 3839.35,1005.11 3839.35,962.65 R3.1 ; v1@3834.7,1130 R20.1 3837.28,1248.57 3837.28,1465 3837.28,1657.43 3839.85,1660 3838.85,1661 3838.85,1781 3838.85,1816 ; 3835,1816 v1(3835,1855) ; 3838.85,1818 3838.85,2008 3837.85,2009 3840.35,2011.5 3840.35,2165 3840.35,2326 v1@3840.35,2430 ; 3840.35,2457 3840.35,2639.82 3849,2648.47 R12.1 3853,2682 3853,2847 3853,3125.15 R11.1 3859.85,3132 3859.85,3243 3859.85,3403 R53.1 3858.35,3406.5 3858.35,3659 3858.35,3876.35 R54.1 ; v1@3853,3704 3853,3705 v1(3855,3707) ; A3.11 v1(4557,1378.5) 4604.12,1378.5 4627.47,1401.85 R24.1 4657,1243 R23.1 ; A1.11 4492.22,621.5 v1(4537,621.5) 4600.27,621.5 4617.47,638.7 R8.1 R7.1 ; A8.11 v1(4564.67,3594.5) 4623.67,3653.5 R58.1 R57.1@4653.2,3505.5 ; A2.11 v1(4553.12,2810.5) 4637.47,2894.85 R16.1 4667,2726 R15.1 ; A7.11 4415.53,2102.5 4418.02,2100 4491.12,2100 4493.12,2102 4532.88,2102 4534.88,2100 v1(4566.18,2100) 4597.47,2100 4617.82,2120.35 4647.35,2120.35 R50.2 4654,1983 R49.2
  Top Layer w40: A9.3 952.92,287.35 1012.42,227.85 1929.66,227.85 C15.2@1951,206.51 ; A6.4 1810.98,2927.98 1831.66,2927.98 1853,2949.32 C9.2 ; C15.2 C15.2@1951,206.51 ; PROGRAMATOR.4 3291,102 3072.13,320.87 3072.13,402.89 X8.MH1 3041.78,433.24 2960.67,433.24 X8.4 2766.53,414 X8.MH2 2584.32,411.32 2229.31,411.32 C14.1 2223.72,411.01 2057.39,244.68 1972.34,244.68 1951,223.34 C15.2@1951,206.51
  Bottom Layer w10: X2.6 1990.88,1415.12 ; C12.1 v1(2301,1488) 2241,1548 1990.88,1548 ; v1(2306,3112) 2306,3100 1990.88,2784.88 H1.2 1990.88,1548 ; v1(2524,1840) 2524,1832 2560.5,1795.5 C17.1 ; X8.MH2 1990.88,1010.12 1990.88,1415.12 ; v1(2638,1621) 2638.86,1620.14 2647.14,1620.14 2683,1656 C16.1 ; C13.1 2652,1331.99 2652,1473.18 2660,1481.18 v1(2660,1492) 2845,1492 3263,1910 X6.2 ; v1(2936,1789) v1(3035,1888) ; 1990.88,1415.12 1990.88,1548
  Bottom Layer w30: v1(3832,1130) 3832,938 3910.67,859.33 4306.27,859.33 4462.67,702.93 4527,638.6 4527,636.91 4537,626.91 v1(4537,621.5) ; v1(3835,1855) 3868,1822 4227.76,1822 4557,1492.76 v1(4557,1378.5) ; v1(3835,2430) 3851,2414 4318.88,2414 4563,2169.88 4563,2103.18 v1(4566.18,2100) ; v1(3850,2916) 4303,2916 4408.5,2810.5 v1(4553.12,2810.5) ; v1(3855,3707) 3856,3706 4357,3706 4468.5,3594.5 v1(4564.67,3594.5)
  other v1: 3190,1191 4043,1200 3185,1391 4112,1904 4146,2583
NetA1_1: A1.1 Q1.2 | length 599
  Top Layer w10: A1.1 4182.65,771.5 4255.67,844.52 4602.25,844.52 4672.67,914.95 4672.67,916.19 4689,932.52 Q1.2
NetA1_2: A1.2 Q1.1 R3.2 | length 1044.1
  Top Layer w10: R3.2 3939,947.65 3939,926.47 4141.37,724.1 4163.31,724.1 A1.2
  Top Layer w30: R3.2@3939,947.65 3945.65,941 Q1.1
NetA1_6: A1.6 Q2.1 R4.2 | length 1119.5
  Top Layer w10: R4.2@3932,538.15 3948.65,521.5 A1.6
  Top Layer w30: R4.2@3932,538.15 3932,516.47 4342.47,106 Q2.1
NetA1_7: A1.7 Q2.2 | length 666.6
  Top Layer w10: A1.7 4176.95,471.5 4183.24,465.2 4183.24,454.17 4464.41,173 4611.72,173 4652.67,132.05 4652.67,130.81 4669,114.48 Q2.2
NetA1_8: A1.8 Q3.2 | length 645.9
  Top Layer w10: A1.8 4397.21,471.5 4533.71,335 4900.48,335 4917.81,352.33 4919.05,352.33 4926.67,359.95 4926.67,361.19 4943,377.52 Q3.2
NetA1_9: A1.9 Q3.1 R7.2 | length 568.6
  Top Layer w10: A1.9 4397.21,521.5 4532.71,386 R7.2
  Top Layer w30: R7.2 Q3.1
NetA1_13: A1.13 Q4.1 R8.2 | length 519.7
  Top Layer w10: A1.13 4393.53,721.5 4417.03,745 R8.2
  Top Layer w30: R8.2 4650,748 4885,748 Q4.1
NetA1_14: A1.14 Q4.2 | length 595.3
  Top Layer w10: A1.14 4400.9,771.5 4429.4,800 4897.48,800 4912.81,784.67 4914.05,784.67 4921.67,777.05 4921.67,775.81 4938,759.48 Q4.2
NetA2_1: A2.1 Q5.2 | length 211.1
  Top Layer w10: A2.1 4186.91,2999.11 4280,3092.2 Q5.2
NetA2_2: A2.2 Q5.1 R11.2 | length 635.1
  Top Layer w10: R11.2 3965.15,3034.85 4089.5,2910.5 A2.2
  Top Layer w30: R11.2 3967.15,3133 Q5.1
NetA2_6: A2.6 Q6.1 R12.2 | length 650.5
  Top Layer w10: R12.2 4140.21,2678 4172.7,2710.5 A2.6
  Top Layer w30: R12.2 3955.3,2648.47 4141.28,2462.5 Q6.1
NetA2_7: A2.7 Q6.2 | length 269.2
  Top Layer w10: A2.7 4225.5,2660.5 4304.2,2581.8 Q6.2
NetA2_8: A2.8 Q8.2 | length 635.8
  Top Layer w10: A2.8@4401.91,2660.06 A2.8 4418.21,2660.5 4524.71,2554 4887.72,2554 4938.67,2604.95 4938.67,2606.19 4955,2622.52 Q8.2
NetA2_9: A2.9 Q8.1 R15.2 | length 546.6
  Top Layer w10: A2.9 4490.5,2710.5 4582.3,2618.7 R15.2
  Top Layer w30: R15.2 4892.7,2618.7 Q8.1
NetA2_13: A2.13 Q7.1 R16.2 | length 879.9
  Top Layer w10: A2.13 4404.09,2913.1 4495.62,2913.1 v1(4499.01,2916.49)
  Top Layer w30: R16.2 4924.54,3001.15 Q7.1
  Bottom Layer w10: v1(4499.01,2916.49) 4511.33,2916.49 4511.82,2916 4566.32,2970.5 Q7.1
NetA2_14: A2.14 Q7.2 | length 570.3
  Top Layer w10: A2.14 4836.5,2960.5 4876.5,2920.5 Q7.2
NetA3_1: A3.1 Q9.2 | length 188.3
  Top Layer w10: A3.1 4179.93,1528.5 4274.76,1623.33 4274.76,1654.76 Q9.2
NetA3_2: A3.2 Q9.1 R19.2 | length 612.7
  Top Layer w10: R19.2 3940.98,1665.65 3940.98,1648.03 4110.51,1478.5 A3.2
  Top Layer w30: R19.2@3940.98,1665.65 3947.63,1659 Q9.1
NetA3_6: A3.6 Q10.1 R20.2 | length 665.1
  Top Layer w10: R20.2 4113.97,1246 4146.46,1278.5 A3.6
  Top Layer w30: R20.2 3941,1216.47 4135.98,1021.5 Q10.1
NetA3_7: A3.7 Q10.2 | length 267.9
  Top Layer w10: A3.7 4163.2,1199.59 4305.62,1057.17 4305.62,1026.07 Q10.2
NetA3_8: A3.8 Q12.2 | length 675.7
  Top Layer w10: A3.8 4394.5,1228.5 4540.99,1082 4883.72,1082 4937.67,1135.95 4937.67,1137.19 4954,1153.52 Q12.2
NetA3_9: A3.9 Q12.1 R23.2 | length 599.6
  Top Layer w10: A3.9 4394.5,1278.5 4541.29,1131.7 R23.2
  Top Layer w30: R23.2 4873.7,1131.7 Q12.1
NetA3_13: A3.13 Q11.1 R24.2 | length 570.7
  Top Layer w10: A3.13 4597.82,1478.5 4627.47,1508.15 R24.2
  Top Layer w30: R24.2 4904.85,1508.15 Q11.1
NetA3_14: A3.14 Q11.2 | length 648.6
  Top Layer w10: A3.14 4394.5,1528.5 4426,1560 4912.72,1560 4960.67,1512.05 4960.67,1510.81 4977,1494.48 Q11.2
NetA4_5: A4.5 C6.2 | length 150.3
  Top Layer w10: A4.5 2852.24,3450 2983.45,3450 C6.2
NetA6_1: A6.1 R28.2 | length 327.4
  Top Layer w40: R28.2@534,4012 534,4009.5 762,3781.5 A6.1
NetA7_1: A7.1 Q13.2 | length 517.7
  Top Layer w10: A7.1 4206.65,2252.5 4277.15,2323 4595.42,2323 4641.2,2368.78 4641.2,2378.5 Q13.2
NetA7_2: A7.2 Q13.1 R45.2 | length 983.1
  Top Layer w10: R45.2 3953.15,2296.47 3969.8,2279.82 4047.13,2202.5 A7.2
  Top Layer w30: R45.2@3958.62,2331.47 3958.62,2361 3982.12,2384.5 Q13.1
NetA7_6: A7.6 Q14.1 R46.2 | length 1131.9
  Top Layer w10: R46.2 4136.68,1966 4173.18,2002.5 A7.6
  Top Layer w30: R46.2 3936.15,1936.47 4147.62,1725 Q14.1
NetA7_7: A7.7 Q14.2 | length 642
  Top Layer w10: A7.7 4206.65,1952.5 4387.14,1772 4694.72,1772 4715.67,1751.05 4715.67,1749.81 4732,1733.48 Q14.2
NetA7_8: A7.8 Q15.2 | length 647.3
  Top Layer w10: A7.8 4421.21,1952.5 4573.71,1800 4883.72,1800 4934.67,1850.95 4934.67,1852.19 4951,1868.52 Q15.2
NetA7_9: A7.9 Q15.1 R49.1 | length 552.1
  Top Layer w10: A7.9 4498.68,2002.5 4628.47,1872.7 R49.1
  Top Layer w30: R49.1 4660.15,1874.85 4898.85,1874.85 Q15.1
NetA7_13: A7.13 Q16.1 R50.1 | length 534.5
  Top Layer w10: A7.13 4593.67,2202.5 4624.47,2233.3 R50.1
  Top Layer w30: R50.1 4874.3,2233.3 Q16.1
NetA7_14: A7.14 Q16.2 | length 629.8
  Top Layer w10: A7.14 4415.52,2252.5 4421.81,2258.79 4421.81,2269.81 4457,2305 4935.72,2305 4944.67,2296.05 4944.67,2294.81 4961,2278.48 Q16.2
  Bottom Layer w10: Q16.2 4967,2264 4967,2250.48 4969,2248.47
NetA8_1: A8.1 Q18.2 | length 563.9
  Top Layer w10: A8.1 4193.36,3744.5 4292.87,3844 4609.14,3844 4630.2,3865.05 Q18.2
NetA8_2: A8.2 Q18.1 R54.2 | length 827.4
  Top Layer w10: R54.2@3967,3867 3967,3852.86 3978.65,3841.2 3992.8,3841.2 4139.5,3694.5 4193.36,3694.5 4306.87,3808 4522,3808 v1(4524,3806)
  Bottom Layer w10: v1(4524,3806) 4564.16,3846.16 4564.16,3903.97 4564.53,3904.34 4564.53,3909.83 Q18.1
NetA8_6: A8.6 Q17.1 R53.2 | length 759.2
  Top Layer w10: R53.2 4002,3404 4092.5,3494.5 A8.6 4231.5,3494.5 4485,3241 4581.69,3241 Q17.1
NetA8_7: A8.7 Q17.2 | length 547.2
  Top Layer w10: A8.7 4197.05,3444.5 4271.54,3370 v1(4279,3370)
  Bottom Layer w10: v1(4279,3370) 4512.42,3370 4616.87,3265.55 4616.87,3264.31 4633.2,3247.98 Q17.2
NetA8_8: A8.8 Q19.2 | length 613.2
  Top Layer w10: A8.8@4393.8,3441.89 A8.8 4407.93,3444.5 4495.09,3357.33 4921.05,3357.33 4928.67,3364.95 4928.67,3366.19 4945,3382.52 Q19.2
NetA8_9: A8.9 Q19.1 R57.2 | length 554.7
  Top Layer w10: A8.9 4528.37,3494.5 4624.67,3398.2 R57.2
  Top Layer w30: R57.2 4887.8,3398.2 Q19.1 Q19.1@4900.67,3385.33
NetA8_13: A8.13 Q20.1 R58.2 | length 592.7
  Top Layer w10: A8.13 4558.37,3694.5 4623.67,3759.8 R58.2
  Top Layer w30: R58.2 4655.67,3762.27 4859.27,3762.27 4880.17,3783.17 Q20.1
NetA8_14: A8.14 Q20.2 | length 565.6
  Top Layer w10: A8.14 4393.44,3742.25 4511.75,3742.25 v1(4520,3734)
  Bottom Layer w10: v1(4520,3734) 4524,3738 4948,3738 Q20.2@4950,3736
NetA9_1: A9.1 R29.2 | length 1065.8
  Top Layer w40: R29.2 1426,2174 A9.1
NetC2_1: C2.1 C3.1 | length 384.1
  Bottom Layer w10: C3.1 2742,2236.99 C2.1
NetC5_2: C5.2 R41.2 | length 149.9
  Top Layer w10: C5.2 2984.45,3720.5 R41.2
NetF1_2: F1.2 R28.1 | length 554
  Top Layer w40: F1.2@330,3460.98 330,3854.68 330,4004.85 330.57,4005.43 R28.1@330.57,4014.77
NetF2_2: F2.2 R29.1 | length 869.3
  Top Layer w40: R29.1 368.55,2131.45 368.55,1716 F2.2@368.55,1322.3
NetH1_1: H1.1 R32.2 | length 347.8
  Top Layer w10: H1.1 1890.88,1705.88 2065,1880 R32.2@2101.01,1880
NetJ1_1: J1.1 Q1.3 | length 1357.1
  Top Layer w30: Q1.3 5051,941 J1.1@5790,1680
NetJ2_1: J2.1 Q2.3 | length 2715.1
  Top Layer w30: Q2.3 4987.89,106 5124,242.11 5124,526 5220,622 5543.26,622 6576.73,1655.47 6605.47,1655.47 J2.1
NetJ3_1: J3.1 Q3.3 | length 1931.7
  Top Layer w30: Q3.3 4993,481 5970,1458 6123,1458 6320.47,1655.47 6325.47,1655.47 J3.1@6338.05,1668.05
NetJ4_1: J4.1 Q4.3 | length 1452.4
  Top Layer w30: Q4.3@4987.42,753 5053,753 5970,1670 J4.1
NetJ5_1: J5.1 Q5.3 | length 2522.4
  Bottom Layer w30: Q5.3 6158,3133 6620,2671 J5.1
NetJ6_1: J6.1 Q6.3 | length 2122.2
  Bottom Layer w30: Q6.3 6312.5,2462.5 6340,2435 J6.1
NetJ7_1: J7.1 Q7.3 | length 1057
  Top Layer w30: Q7.3 5059.5,2870.5 5565,2365 5725,2365 J7.1
NetJ8_1: J8.1 Q8.3 | length 628
  Top Layer w30: Q8.3 5268,2368 5442,2368 J8.1
NetJ9_1: J9.1 Q9.3 | length 1308.1
  Top Layer w30: Q9.3 5081.67,1659 5412.67,1990 J9.1
NetJ10_1: J10.1 Q10.3 | length 1408.4
  Bottom Layer w30: Q10.3 4628.7,1290 5120,1290 J10.1
NetJ11_1: J11.1 Q11.3 | length 961.8
  Top Layer w30: Q11.3 5170.29,1486 5674.29,1990 J11.1
NetJ12_1: J12.1 Q12.3 | length 1453.1
  Top Layer w30: Q12.3 5192,1162 5680,1650 5680,1742.43 5697.57,1760 5775,1760 6003.05,1988.05 6058.05,1988.05 J12.1
NetJ13_1: J13.1 Q13.3 | length 1432.8
  Bottom Layer w30: Q13.3 4699.37,2386.67 4707.38,2386.67 4710.72,2390 6039,2390 6060,2369 J13.1
NetJ14_1: J14.1 Q14.3 | length 2181.8
  Bottom Layer w30: Q14.3@4784.2,1725 4784.2,1873.06 4922.33,2011.2 5061.13,2150 6448,2150 6620,2322 J14.1
NetJ15_1: J15.1 Q15.3 | length 1516.9
  Bottom Layer w30: Q15.3 5002,1877 5215,2090 6322.43,2090 6340,2072.43 J15.1
NetJ16_1: J16.1 Q16.3 | length 1725
  Top Layer w30: Q16.3 5204,2270 5319,2155 6455,2155 6605.47,2004.53 J16.1
NetJ17_1: J17.1 Q17.3 | length 1095
  Top Layer w30: Q17.3 4934.5,3239.5 5500,2674 J17.1
NetJ18_1: J18.1 Q18.3 | length 2422.5
  Top Layer w30: Q18.3 5115.43,3925.5 5133,3907.92 5133,3607.16 5176.16,3564 5491.12,3564 6340,2715.12 J18.1
NetJ19_1: J19.1 Q19.3 | length 1100.2
  Top Layer w30: Q19.3 4997.17,3388.83 5021.17,3388.83 5732,2678 J19.1
NetJ20_1: J20.1 Q20.3 | length 1581.3
  Top Layer w30: Q20.3 5130.52,3499.81 5245.19,3499.81 6058.05,2686.95 6058.05,2631.95 J20.1
NetJ21_1: J21.1 P1.1 | length 350
  Top Layer w40: J21.1 P1.1
NetR25_1: R25.1 X2.3 | length 141.1
  Top Layer w10: X2.3 2483.99,1049 R25.1
NetR26_2: R26.2 X2.4 | length 169.6
  Top Layer w10: R26.2 2108.69,1050.32 2255.68,1050.32 X2.4
NetR31_2: R31.2 X8.2 | length 155.8
  Top Layer w10: R31.2 2774.8,744.2 X8.2
NetR35_2: R35.2 X8.3 | length 269.4
  Top Layer w10: X8.3 2829,574.9 2829,717.5 2841.41,729.91 2841.41,735.82 2856.09,750.5 R35.2
NRST_6: C1.2 D4.7 R27.1 X6.1 | length 1097.1
  Top Layer w10: D4.7 2554.47,1743.57 2554.47,1709.93 2591.4,1673 2613.03,1673 v1(2613.69,1673.66) ; R27.1@3050,2033 3159,2033 X6.1 3170,2036 C1.2 ; R27.1 v1(3059,2097)
  Bottom Layer w10: v1(2613.69,1673.66) 2621.98,1673.66 2622.45,1673.19 3038.61,2089.35 3051.35,2089.35 v1(3059,2097)
OSC_IN_6: C2.2 D4.5 R30.2 Y1.1 | length 661.2
  Top Layer w10: D4.5 2592.28,1745.13 2592.28,2079.28 2602.31,2089.31 Y1.1
  Bottom Layer w10: Y1.1 2635.9,2095.68 2635.9,2109.69 2581.5,2164.09 R30.2 2582.5,2169 C2.2
OSC_OUT_6: C3.2 D4.6 R30.1 Y1.2 | length 660.2
  Top Layer w10: Y1.2 2573.38,1966.08 D4.6
  Bottom Layer w10: C3.2 2514.5,2174 R30.1 2518.5,2164.09 2450.15,2095.74 Y1.2
PA11_6: D4.32 R31.1 | length 819.5
  Top Layer w10: D4.32 2593.06,821.86 2598.92,816 2627.14,816 2633,821.86 2633,841.14 2638.86,847 2679.14,847 2685,841.14 2685,816.86 2690.86,811 2760.99,811 R31.1@2765.99,816
PA12_6: D4.33 R1.1 R35.1 | length 819.7
  Top Layer w10: D4.33 2612.75,1300.32 2612.75,1190 2612.75,1056.84 2856.09,813.5 R35.1 2971.5,813.5 R1.1
PB6: D1.6 D2.6 D3.6 D4.42 D5.6 R34.1 | length 3785.9
  Top Layer w10: D4.42 2731.17,1566.87 2764.81,1566.87 2914.17,1417.51 v1(2914.17,1308.17) 2925,1308.17 2940.35,1292.82 2982.19,1292.82 R34.1 ; v1(3349,1554) 3355,1548 3431,1548 3466.58,1512.42 D3.6 ; v1(3351,2962) 3353.26,2959.74 3402.02,2959.74 3457.34,2904.42 3457.34,2890.28 3458.24,2889.37 D2.6 ; v1(3353,2248) 3420,2248 3475.58,2192.42 D5.6 D5.6@3474.8,2169.09 ; v1(3464,820) 3464,777.77 3471,770.77 3470.09,769.87 D1.6
  Bottom Layer w10: v1(3351,2962) 3352,2961 3352,2251 3351,2250 v1(3353,2248) 3349,2244 v1(3349,1554) 3007,1554 2914.17,1461.17 v1(2914.17,1308.17) 2914.17,1300.09 3394.26,820 v1(3464,820)
PB7: D1.7 D2.7 D3.7 D4.43 D5.7 R33.1 | length 3252
  Top Layer w10: D4.43 2731.17,1586.56 2777.02,1586.56 2953.17,1410.4 2970.6,1410.4 2972,1409 2982,1409 R33.1@2998.5,1409 ; R33.1 2987,1415 v1(2987,1469) ; v1(3392,876) 3392,792.6 3433.64,750.96 3465.8,750.96 D1.7 ; v1(3402,1476) 3423.82,1454.18 D3.7 ; v1(3404,2175) 3428.04,2150.96 3474.8,2150.96 D5.7 ; v1(3404,2893) 3406.51,2893 3429.83,2869.68 D2.7
  Bottom Layer w10: v1(2987,1469) 3395,1469 v1(3402,1476) ; v1(3392,876) 3392,1466 v1(3402,1476) ; v1(3404,2893) v1(3404,2175) 3402,2173 v1(3402,1476)
PB8: D4.45 D6.6 R39.1 | length 2769.1
  Top Layer w10: D4.45 2834.3,1626.71 v1(2876.5,1584.5) 2924,1537 R39.1 ; v1(3399,3737) 3403.1,3737 3470.73,3669.37 D6.6
  Bottom Layer w10: v1(2876.5,1584.5) 2876.5,1834.5 3172,2130 3172,3510 v1(3399,3737)
PB9: D4.46 D6.7 R38.1 | length 2575.9
  Top Layer w10: D4.46 2966.4,1646.39 R38.1 2969.01,1654.91 2930.91,1693.01 v1(2925,1693.01) ; v1(3402,3668) 3412.82,3668 3431.14,3649.68 D6.7
  Bottom Layer w10: v1(2925,1693.01) 3205.53,1973.54 3205.53,3468.53 3402,3665 v1(3402,3668)
PC13_6: D4.2 R32.1 | length 579.3
  Top Layer w10: R32.1 2182.87,1883.13 v1(2342,1883.13) ; v1(2635,1833) 2635,1822.18 2652.12,1805.06 D4.2
  Bottom Layer w10: v1(2342,1883.13) 2344.87,1886 2582,1886 v1(2635,1833)
SYS_JTCK-SWCLK_6: D4.37 PROGRAMATOR.2 | length 1743.1
  Top Layer w10: D4.37@2726,1470.01 2752.74,1470.01 2754.42,1468.32 2758.06,1468.32 2760.28,1466.1 2764.9,1466.1 2814,1417 v1(2814,1392)
  Bottom Layer w10: v1(2814,1392) 2814,1321 3582,553 PROGRAMATOR.2
SYS_JTMS_SWDIO_6: D4.34 PROGRAMATOR.3 | length 1660.5
  Top Layer w10: D4.34 2632.43,1347.57 2869.5,1110.5 v1(2869.5,891)
  Bottom Layer w10: v1(2869.5,891) 3482,278.5 PROGRAMATOR.3
USART1_RX_6: D4.31 X5.2 | length 3134.6
  Top Layer w10: v1(2510,1315) 2513.95,1318.95 2542.62,1318.95 2572.6,1348.93 2572.6,1411.43 D4.31
  Bottom Layer w10: v1(2510,1315) 2504.14,1320.86 2475,1320.86 2475,1425 2227,1673 2227,2377.46 2380,2530.46 2380,2760 2450,2830 2450,3664.74 2516.54,3731.28 X5.2
USART1_TX_6: D4.30 X5.3@2616.54,4055.12 | length 2927.3
  Top Layer w10: v1(2485,1515) 2552.91,1447.09 2552.91,1411.43 D4.30 D4.30@2552.91,1409.87
  Bottom Layer w10: v1(2485,1515) 2245,1755 2245,2370 2420,2545 2420,2700 2616.54,2896.54 X5.3@2616.54,4055.12
VOUTA_1: A7.3 D5.1 | length 640.1
  Top Layer w10: D5.1 3670.46,2091.13 v1(3710.59,2051) ; v1(4093,2159) 4096.9,2155.1 4187.31,2155.1 A7.3
  Bottom Layer w10: v1(3710.59,2051) 3710.59,2109.33 3761.26,2160 4092,2160 v1(4093,2159)
VOUTA_2: A1.3 D1.1 | length 697
  Top Layer w10: D1.1 3653.95,691.13 3678,667.08 v1(3678,622) ; v1(4094.22,679.38) 4099.85,673.75 4163.66,673.75 A1.3
  Bottom Layer w10: v1(3678,622) 3678,675.36 3751.45,748.81 4021.19,748.81 4090.62,679.38 v1(4094.22,679.38)
VOUTA_3: A2.3 D2.1 | length 690.4
  Top Layer w10: D2.1 3645.61,2795.39 3716,2725 v1(3752,2725) ; v1(4031,2732) 4031,2815 4073.89,2857.89 4184.31,2857.89 A2.3
  Bottom Layer w10: v1(3752,2725) 3759,2732 v1(4031,2732)
VOUTA_4: A3.3 D3.1 | length 639.1
  Top Layer w10: D3.1 3661.46,1395.13 3697,1359.59 v1(3697,1311) ; v1(4071,1433) 4073.25,1430.75 4160.94,1430.75 A3.3
  Bottom Layer w10: v1(3697,1311) 3949,1311 v1(4071,1433)
VOUTA_5: A8.3 D6.1 | length 570.3
  Top Layer w10: D6.1 3687.27,3590.63 3731.9,3546 v1(3743,3546) ; v1(4014,3631) 4024.82,3631 4038.32,3644.5 A8.3
  Bottom Layer w10: v1(3743,3546) 3921,3546 4006,3631 v1(4014,3631)
VOUTB_1: A7.5 D5.2 | length 569.1
  Top Layer w10: D5.2 3649.59,2111.59 3766.59,2111.59 v1(3770,2115) ; v1(3924,2058) 3930,2052 4189.42,2052 A7.5
  Bottom Layer w10: v1(3770,2115) 3827,2058 v1(3924,2058)
VOUTB_2: A1.5 D1.2 | length 604.2
  Top Layer w10: D1.2 v1(3767.19,710.81) ; v1(4084.61,559.5) 4088.62,563.5 4091.02,563.5 4096.41,568.89 4163.31,568.89 A1.5
  Bottom Layer w10: v1(3767.19,710.81) 3947.19,710.81 4087.42,570.58 4084.61,567.78 v1(4084.61,559.5)
VOUTB_3: A2.5 D2.2 | length 578.9
  Top Layer w10: D2.2 3711.68,2830.31 v1(3748,2794) ; v1(4101.3,2754.05) 4106.5,2759.25 4185.67,2759.25 A2.5
  Bottom Layer w10: v1(3748,2794) 4067,2794 4101.3,2759.7 v1(4101.3,2754.05)
VOUTB_4: A3.5 D3.2 | length 560.7
  Top Layer w10: D3.2 v1(3766.19,1414.81) ; v1(3983,1411) 4065.5,1328.5 A3.5
  Bottom Layer w10: v1(3766.19,1414.81) 3770,1411 3771.91,1412.91 3981.09,1412.91 v1(3983,1411)
VOUTB_5: A8.5 D6.2 | length 541.9
  Top Layer w10: D6.2 v1(3746.31,3610.31) ; v1(3924.66,3614.66) 3976.6,3614.66 4044.16,3547.1 4174.02,3547.1 A8.5
  Bottom Layer w10: v1(3746.31,3610.31) 3920.31,3610.31 v1(3924.66,3614.66)
VOUTC_1: A7.10 D5.4 | length 1052.2
  Top Layer w10: D5.4 3649.59,2150.96 3681.75,2150.96 3727.79,2197 v1(3739,2197) ; A7.10 4404.73,2052.25 4511.25,2052.25 v1(4513,2054)
  Bottom Layer w10: v1(3739,2197) 4362,2197 4505,2054 v1(4513,2054)
VOUTC_2: A1.10 D1.4 | length 990.4
  Top Layer w10: D1.4 3640.59,750.96 3674.96,750.96 v1(3716,792) ; A1.10 4381.73,570.25 4448.75,570.25 v1(4450,569)
  Bottom Layer w10: v1(3716,792) 4227,792 v1(4450,569)
VOUTC_3: A2.10 D2.4 | length 1022
  Top Layer w10: D2.4 3646.39,2870.46 3678.56,2870.46 3745.09,2937 v1(3752,2937) ; A2.10 4402.73,2759.25 4481.75,2759.25 v1(4483,2758)
  Bottom Layer w10: v1(3752,2937) 3840,2849 4325,2849 4416,2758 v1(4483,2758)
VOUTC_4: A3.10 D3.4 | length 1046.8
  Top Layer w10: D3.4 3640.59,1454.96 3672.75,1454.96 3722.79,1505 3770,1505 v1(3773,1508) ; A3.10 4380.01,1326.25 4479.75,1326.25 v1(4482,1324)
  Bottom Layer w10: v1(3773,1508) 4298,1508 v1(4482,1324)
VOUTC_5: A8.10 D6.4 | length 1070.7
  Top Layer w10: D6.4 3704.68,3649.68 3730.35,3675.35 3730.35,3689.35 v1(3738,3697) ; A8.10 4393.8,3547.1 4513.61,3547.1 4514.21,3546.5 v1(4518,3546.5)
  Bottom Layer w10: v1(3738,3697) 3766,3669 4297,3669 4419.5,3546.5 v1(4518,3546.5)
VOUTD_1: A7.12 D5.5 | length 1078.7
  Top Layer w10: D5.5 3655,2176.06 v1(3655,2238) ; A7.12 4406.98,2150 v1(4515,2150)
  Bottom Layer w10: v1(3655,2238) 4427,2238 v1(4515,2150)
VOUTD_2: A1.12 D1.5 | length 979.8
  Top Layer w10: D1.5 3639.81,794.81 v1(3698,853) ; A1.12 4419.12,671.5 v1(4421.12,669.5)
  Bottom Layer w10: v1(3698,853) 3700.28,853 3723.28,830 4296,830 4434.67,691.33 4421.12,677.78 v1(4421.12,669.5)
VOUTD_3: A2.12 D2.5 | length 1083.1
  Top Layer w10: D2.5 3641.91,2889.37 3641,2890.28 3641,2955 v1(3664,2978) ; A2.12 4402.48,2859.5 4497,2859.5 v1(4498,2858.5)
  Bottom Layer w10: v1(3664,2978) 4373,2978 4492.5,2858.5 v1(4498,2858.5)
VOUTD_4: A3.12 D3.5 | length 1063.8
  Top Layer w10: D3.5 v1(3639.81,1547.81) ; A3.12 4379.02,1429.75 4477.75,1429.75 v1(4479,1431)
  Bottom Layer w10: v1(3639.81,1547.81) 4362.19,1547.81 v1(4479,1431)
VOUTD_5: A8.12 D6.5 | length 1103.4
  Top Layer w10: D6.5 3666.52,3670.28 3667,3670.28 3667,3719.14 3676,3728.14 v1(3676,3754) ; A8.12 4393.45,3646.75 4515.75,3646.75 v1(4518,3649)
  Bottom Layer w10: v1(3676,3754) 4402.18,3754 4507.18,3649 v1(4518,3649)
pads on no net: A4.1 A4.3 A4.7 A4.8 A6.3 D4.3 D4.4 D4.10 D4.11 D4.12 D4.13 D4.14 D4.15 D4.16 D4.17 D4.18 D4.19 D4.21 D4.22 D4.25 D4.26 D4.27 D4.28 D4.29 D4.38 D4.39 D4.40 D4.41 X5.1 X5.6 X8.1

## Polygon pours and split planes (outlines as drawn)
GND on Top Layer "32" (solid, remove dead copper, pour order 0): 1692.91,0 5314.96,0 6889.76,1574.8 6889.76,2559.06 5314.96,4133.86 1692.91,4133.86
GND on Bottom Layer "GND_L02_P001" (solid, remove dead copper, pour order 1): 1692.91,4133.86 1692.91,0 5314.96,0 6889.76,1574.8 6889.76,2559.06 5314.96,4133.86

## Keep-outs
Keep-Out Layer:
  the board outline again, w10

## Silkscreen, mask and mechanical layers (free items; w line width, h text height)
Top Overlay:
  circle w10: c1968.5,787.4 r78.74
  circle w10: c5314.96,393.7 r78.74
  circle w10: c5314.96,3740.16 r78.74
  circle w10: c2755.91,2559.06 r78.74
  circle w10: c1968.5,3740.16 r78.74
  circle w10: c6060,2579 r118.11